# Altium PCB DSP6748_F.PcbDoc (part 14 of 16)
Units mil, origin at the board's own origin, x right, y up, seen from the top; angles counter-clockwise.
Board outline 8188.98 x 4055.12 mil, 4 copper layers (Top Layer, GND, VCC, Bottom Layer); 409 components, 262 nets, 1424 pads, 350 vias.
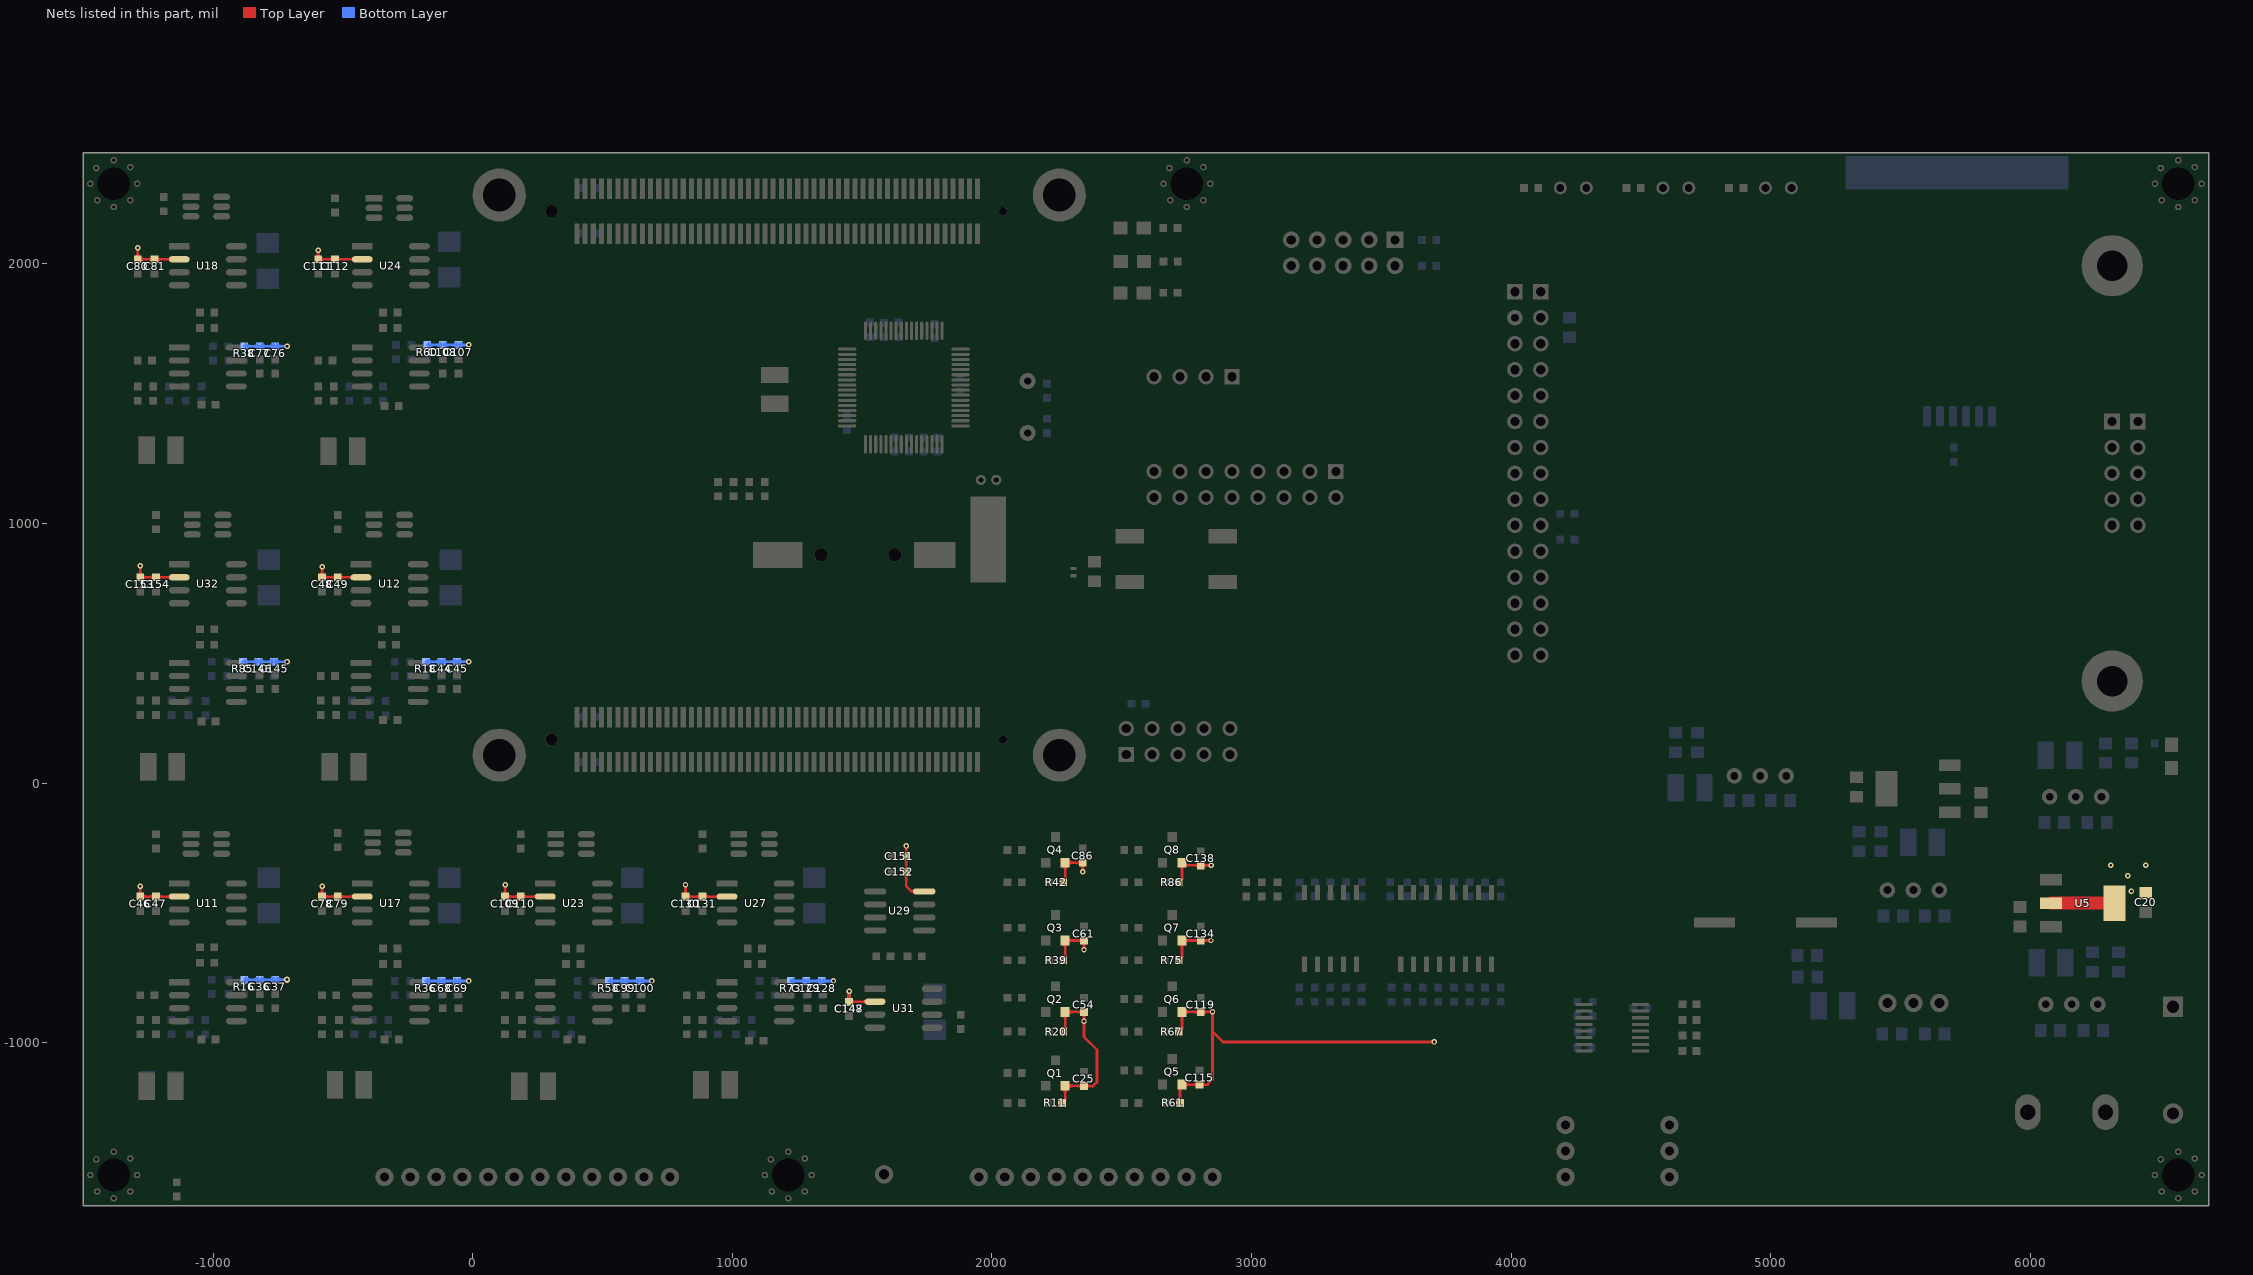
[diagram p16: the nets of this part, all layers, seen from the top]

## Via types
v1: diameter 21, hole 10, Top Layer to Bottom Layer, 244 vias
v2: diameter 20, hole 10, Top Layer to Bottom Layer, 84 vias
v3: diameter 32, hole 16, Top Layer to Bottom Layer, 11 vias
v4: diameter 24, hole 12, Top Layer to Bottom Layer, 7 vias
v5: diameter 39.37, hole 19.68, Top Layer to Bottom Layer, 3 vias
v6: diameter 30, hole 15, Top Layer to Bottom Layer, 1 vias

## Nets (pads, with @x,y where several pads share a name; then routed paths per layer and width w, separated by ;. In a path a pad name is that pad's centre, name@x,y a point inside that pad or via, vN(x,y) a via of type N, cw(c..) or ccw(c..) an arc to the next point about the centre after c; other vN are vias at no path point) (continued)
VCC+5V: C20.1 C25.2 C36.2 C37.2 C44.2 C45.2 C46.2 C47.2 C48.2 C49.2 C54.2 C61.2 C68.2 C69.2 C76.2 C77.2 C78.2 C79.2 C80.2 C81.2 C86.2 C99.2 C100.2 C107.2 C108.2 C109.2 C110.2 C111.2 C112.2 C115.2 C119.2 C128.2 C129.2 C130.2 C131.2 C134.2 C138.2 C145.2 C146.2 C147.2 C148.2 C151.2 C152.2 C153.2 C154.2 Q1.2 Q2.2 Q3.2 Q4.2 Q5.2 Q6.2 Q7.2 Q8.2 R11.2 R16.2 R18.2 R20.2 R36.2 R38.2 R39.2 R42.2 R58.2 R60.2 R61.2 R67.2 R73.2 R75.2 R85.2 R86.2 U5.2 U5.4 U11.2 U12.2 U17.2 U18.2 U23.2 U24.2 U27.2 U29.8 U31.2 U32.2 | length 21807.2
  Top Layer w10: v1(-1290.19,2062.52) C80.2@-1290.19,2017.52 C81.2@-1225.19,2017.52 U18.2@-1130.19,2017.52 ; v1(-1280.19,-397.48) C46.2@-1280.19,-437.48 C47.2@-1220.19,-437.48 U11.2@-1130.19,-437.48 ; v1(-1280.19,837.52) C153.2@-1280.19,792.52 C154.2@-1220.19,792.52 U32.2@-1130.19,792.52 ; v1@-599.08,2048.63 cw(c-608.47,2039.24) -595.19,2039.24 cw(c-581.91,2039.24) v1@-591.3,2048.63 ; v1(-595.19,2052.52) C111.2@-595.19,2017.52 C112.2@-530.19,2017.52 U24.2@-425.19,2017.52 ; v1(-580.19,-397.48) C78.2@-580.19,-437.48 C79.2@-520.19,-437.48 U17.2@-425.19,-437.48 ; v1(-580.19,832.52) C48.2@-580.19,792.52 C49.2@-520.19,792.52 U12.2@-430.19,792.52 ; v1(124.81,-392.48) C109.2@124.81,-437.48 C110.2@184.81,-437.48 U23.2@279.81,-437.48 ; v1(819.81,-392.48) C130.2@819.81,-437.48 C131.2@884.81,-437.48 U27.2@979.81,-437.48 ; v1(1449.81,-802.48) C147.2@1449.81,-842.48 U31.2@1549.81,-842.48 ; v1(1669.81,-242.48) C151.2@1669.81,-282.48 C152.2@1669.81,-342.48 1669.81,-397.48 1689.81,-417.48 U29.8@1739.3,-417.48 ; R11.2@2269.81,-1232.48 2282.21,-1220.08 Q1.2@2282.21,-1166.69 C25.2@2354.81,-1166.69 ; R20.2@2274.81,-957.48 2282.21,-950.08 Q2.2@2282.21,-881.69 C54.2@2354.02,-881.69 ; R39.2@2274.81,-682.48 2282.21,-675.08 Q3.2@2282.21,-606.69 C61.2@2354.81,-606.69 ; R42.2@2274.81,-382.48 2282.21,-375.08 Q4.2@2282.21,-306.69 C86.2@2349.81,-306.69 ; v1@2345.92,-338.59 ccw(c2336.53,-329.2) 2349.81,-329.2 ccw(c2363.09,-329.2) v1@2353.7,-338.59 ; v1(2349.81,-342.48) C86.2@2349.81,-307.48 ; v1@2350.92,-913.59 ccw(c2341.53,-904.2) 2354.81,-904.2 ccw(c2368.09,-904.2) v1@2358.7,-913.59 ; v1@2350.92,-638.59 ccw(c2341.53,-629.2) 2354.81,-629.2 ccw(c2368.09,-629.2) v1@2358.7,-638.59 ; C25.2@2354.81,-1167.48 2389.81,-1167.48 2404.81,-1152.48 2404.81,-1027.48 2354.81,-977.48 v1(2354.81,-917.48) C54.2@2354.81,-882.48 ; v1(2354.81,-642.48) C61.2@2354.81,-607.48 ; R67.2@2719.81,-957.48 2732.21,-945.08 Q6.2@2732.21,-886.69 ; R75.2@2719.81,-682.48 2732.21,-670.08 Q7.2@2732.21,-611.69 ; R86.2@2719.81,-382.48 2732.21,-370.08 2732.21,-316.69 C138.2@2804.02,-316.69 ; R61.2@2724.81,-1232.48 2724.81,-1169.09 Q5.2@2732.21,-1161.69 2830.6,-1161.69 2849.81,-1142.48 2849.81,-957.48 ; Q6.2@2732.21,-881.69 2844.81,-881.69 2849.81,-886.69 2849.81,-957.48 ; Q7.2@2732.21,-606.69 v1(2844.02,-606.69) ; C138.2@2804.81,-317.48 v1(2844.81,-317.48) ; v1(3704.81,-997.48) 2889.81,-997.48 2849.81,-957.48 ; C80.2@-1297.26,2024.59 ccw(c-1314.33,2041.66) -1290.19,2041.66 ; C80.2@-1297.26,2024.59 ccw(c-1314.33,2041.66) -1290.19,2041.66 ; C80.2@-1297.26,2024.59 ccw(c-1314.33,2041.66) -1290.19,2041.66 ; v1@-1294.08,2058.63 cw(c-1303.47,2049.24) -1290.19,2049.24 ; v1@-1294.08,2058.63 cw(c-1303.47,2049.24) -1290.19,2049.24 ; v1@-1294.08,2058.63 cw(c-1303.47,2049.24) -1290.19,2049.24 ; -1290.19,2041.66 ccw(c-1266.05,2041.66) C80.2@-1283.12,2024.59 ; -1290.19,2041.66 ccw(c-1266.05,2041.66) C80.2@-1283.12,2024.59 ; -1290.19,2041.66 ccw(c-1266.05,2041.66) C80.2@-1283.12,2024.59 ; -1290.19,2049.24 cw(c-1276.91,2049.24) v1@-1286.3,2058.63 ; -1290.19,2049.24 cw(c-1276.91,2049.24) v1@-1286.3,2058.63 ; -1290.19,2049.24 cw(c-1276.91,2049.24) v1@-1286.3,2058.63 ; C46.2@-1287.26,-430.41 ccw(c-1304.33,-413.34) -1280.19,-413.34 ; C46.2@-1287.26,-430.41 ccw(c-1304.33,-413.34) -1280.19,-413.34 ; C46.2@-1287.26,-430.41 ccw(c-1304.33,-413.34) -1280.19,-413.34 ; C153.2@-1287.26,799.59 ccw(c-1304.33,816.66) -1280.19,816.66 ; C153.2@-1287.26,799.59 ccw(c-1304.33,816.66) -1280.19,816.66 ; C153.2@-1287.26,799.59 ccw(c-1304.33,816.66) -1280.19,816.66 ; v1@-1284.08,-401.37 cw(c-1293.47,-410.76) -1280.19,-410.76 ; v1@-1284.08,-401.37 cw(c-1293.47,-410.76) -1280.19,-410.76 ; v1@-1284.08,-401.37 cw(c-1293.47,-410.76) -1280.19,-410.76 ; v1@-1284.08,833.63 cw(c-1293.47,824.24) -1280.19,824.24 ; v1@-1284.08,833.63 cw(c-1293.47,824.24) -1280.19,824.24 ; v1@-1284.08,833.63 cw(c-1293.47,824.24) -1280.19,824.24 ; C80.2@-1283.12,2010.45 cw(c-1266.05,1993.38) -1266.05,2017.52 ; C80.2@-1283.12,2010.45 cw(c-1266.05,1993.38) -1266.05,2017.52 ; C80.2@-1283.12,2010.45 cw(c-1266.05,1993.38) -1266.05,2017.52 ; C80.2@-1283.12,2024.59 ccw(c-1266.05,2041.66) -1266.05,2017.52 ; C80.2@-1283.12,2024.59 ccw(c-1266.05,2041.66) -1266.05,2017.52 ; C80.2@-1283.12,2024.59 ccw(c-1266.05,2041.66) -1266.05,2017.52 ; -1280.19,-413.34 ccw(c-1256.05,-413.34) C46.2@-1273.12,-430.41 ; -1280.19,-413.34 ccw(c-1256.05,-413.34) C46.2@-1273.12,-430.41 ; -1280.19,-413.34 ccw(c-1256.05,-413.34) C46.2@-1273.12,-430.41 ; -1280.19,-410.76 cw(c-1266.91,-410.76) v1@-1276.3,-401.37 ; -1280.19,-410.76 cw(c-1266.91,-410.76) v1@-1276.3,-401.37 ; -1280.19,-410.76 cw(c-1266.91,-410.76) v1@-1276.3,-401.37 ; -1280.19,816.66 ccw(c-1256.05,816.66) C153.2@-1273.12,799.59 ; -1280.19,816.66 ccw(c-1256.05,816.66) C153.2@-1273.12,799.59 ; -1280.19,816.66 ccw(c-1256.05,816.66) C153.2@-1273.12,799.59 ; -1280.19,824.24 cw(c-1266.91,824.24) v1@-1276.3,833.63 ; -1280.19,824.24 cw(c-1266.91,824.24) v1@-1276.3,833.63 ; -1280.19,824.24 cw(c-1266.91,824.24) v1@-1276.3,833.63 ; C46.2@-1273.12,-444.55 cw(c-1256.05,-461.62) -1256.05,-437.48 ; C46.2@-1273.12,-444.55 cw(c-1256.05,-461.62) -1256.05,-437.48 ; C46.2@-1273.12,-444.55 cw(c-1256.05,-461.62) -1256.05,-437.48 ; C46.2@-1273.12,-430.41 ccw(c-1256.05,-413.34) -1256.05,-437.48 ; C46.2@-1273.12,-430.41 ccw(c-1256.05,-413.34) -1256.05,-437.48 ; C46.2@-1273.12,-430.41 ccw(c-1256.05,-413.34) -1256.05,-437.48 ; C153.2@-1273.12,785.45 cw(c-1256.05,768.38) -1256.05,792.52 ; C153.2@-1273.12,785.45 cw(c-1256.05,768.38) -1256.05,792.52 ; C153.2@-1273.12,785.45 cw(c-1256.05,768.38) -1256.05,792.52 ; C153.2@-1273.12,799.59 ccw(c-1256.05,816.66) -1256.05,792.52 ; C153.2@-1273.12,799.59 ccw(c-1256.05,816.66) -1256.05,792.52 ; C153.2@-1273.12,799.59 ccw(c-1256.05,816.66) -1256.05,792.52 ; -1249.33,2017.52 cw(c-1249.33,1993.38) C81.2@-1232.26,2010.45 ; -1249.33,2017.52 ccw(c-1249.33,2041.66) C81.2@-1232.26,2024.59 ; -1249.33,2017.52 cw(c-1249.33,1993.38) C81.2@-1232.26,2010.45 ; -1249.33,2017.52 ccw(c-1249.33,2041.66) C81.2@-1232.26,2024.59 ; -1249.33,2017.52 ccw(c-1249.33,2041.66) C81.2@-1232.26,2024.59 ; -1249.33,2017.52 cw(c-1249.33,1993.38) C81.2@-1232.26,2010.45 ; -1244.33,-437.48 cw(c-1244.33,-461.62) C47.2@-1227.26,-444.55 ; -1244.33,-437.48 ccw(c-1244.33,-413.34) C47.2@-1227.26,-430.41 ; -1244.33,-437.48 cw(c-1244.33,-461.62) C47.2@-1227.26,-444.55 ; -1244.33,-437.48 ccw(c-1244.33,-413.34) C47.2@-1227.26,-430.41 ; -1244.33,-437.48 ccw(c-1244.33,-413.34) C47.2@-1227.26,-430.41 ; -1244.33,-437.48 cw(c-1244.33,-461.62) C47.2@-1227.26,-444.55 ; -1244.33,792.52 cw(c-1244.33,768.38) C154.2@-1227.26,785.45 ; -1244.33,792.52 ccw(c-1244.33,816.66) C154.2@-1227.26,799.59 ; -1244.33,792.52 cw(c-1244.33,768.38) C154.2@-1227.26,785.45 ; -1244.33,792.52 ccw(c-1244.33,816.66) C154.2@-1227.26,799.59 ; -1244.33,792.52 ccw(c-1244.33,816.66) C154.2@-1227.26,799.59 ; -1244.33,792.52 cw(c-1244.33,768.38) C154.2@-1227.26,785.45 ; C81.2@-1218.12,2010.45 cw(c-1201.05,1993.38) -1201.05,2017.52 ; C81.2@-1218.12,2010.45 cw(c-1201.05,1993.38) -1201.05,2017.52 ; C81.2@-1218.12,2010.45 cw(c-1201.05,1993.38) -1201.05,2017.52 ; C81.2@-1218.12,2024.59 ccw(c-1201.05,2041.66) -1201.05,2017.52 ; C81.2@-1218.12,2024.59 ccw(c-1201.05,2041.66) -1201.05,2017.52 ; C81.2@-1218.12,2024.59 ccw(c-1201.05,2041.66) -1201.05,2017.52 ; C47.2@-1213.12,-444.55 cw(c-1196.05,-461.62) -1196.05,-437.48 ; C47.2@-1213.12,-444.55 cw(c-1196.05,-461.62) -1196.05,-437.48 ; C47.2@-1213.12,-444.55 cw(c-1196.05,-461.62) -1196.05,-437.48 ; C47.2@-1213.12,-430.41 ccw(c-1196.05,-413.34) -1196.05,-437.48 ; C47.2@-1213.12,-430.41 ccw(c-1196.05,-413.34) -1196.05,-437.48 ; C47.2@-1213.12,-430.41 ccw(c-1196.05,-413.34) -1196.05,-437.48 ; C154.2@-1213.12,785.45 cw(c-1196.05,768.38) -1196.05,792.52 ; C154.2@-1213.12,785.45 cw(c-1196.05,768.38) -1196.05,792.52 ; C154.2@-1213.12,785.45 cw(c-1196.05,768.38) -1196.05,792.52 ; C154.2@-1213.12,799.59 ccw(c-1196.05,816.66) -1196.05,792.52 ; C154.2@-1213.12,799.59 ccw(c-1196.05,816.66) -1196.05,792.52 ; C154.2@-1213.12,799.59 ccw(c-1196.05,816.66) -1196.05,792.52 ; -1175.09,-437.48 cw(c-1175.09,-454.38) U11.2@-1163.14,-442.43 ; -1175.09,-437.48 ccw(c-1175.09,-420.58) U11.2@-1163.14,-432.53 ; -1175.09,-437.48 cw(c-1175.09,-454.38) U11.2@-1163.14,-442.43 ; -1175.09,-437.48 ccw(c-1175.09,-420.58) U11.2@-1163.14,-432.53 ; -1175.09,-437.48 ccw(c-1175.09,-420.58) U11.2@-1163.14,-432.53 ; -1175.09,-437.48 cw(c-1175.09,-454.38) U11.2@-1163.14,-442.43 ; -1175.09,792.52 cw(c-1175.09,775.62) U32.2@-1163.14,787.57 ; -1175.09,792.52 ccw(c-1175.09,809.42) U32.2@-1163.14,797.47 ; -1175.09,792.52 cw(c-1175.09,775.62) U32.2@-1163.14,787.57 ; -1175.09,792.52 ccw(c-1175.09,809.42) U32.2@-1163.14,797.47 ; -1175.09,792.52 ccw(c-1175.09,809.42) U32.2@-1163.14,797.47 ; -1175.09,792.52 cw(c-1175.09,775.62) U32.2@-1163.14,787.57 ; -1175.09,2017.52 cw(c-1175.09,2000.62) U18.2@-1163.14,2012.57 ; -1175.09,2017.52 ccw(c-1175.09,2034.42) U18.2@-1163.14,2022.47 ; -1175.09,2017.52 cw(c-1175.09,2000.62) U18.2@-1163.14,2012.57 ; -1175.09,2017.52 ccw(c-1175.09,2034.42) U18.2@-1163.14,2022.47 ; -1175.09,2017.52 ccw(c-1175.09,2034.42) U18.2@-1163.14,2022.47 ; -1175.09,2017.52 cw(c-1175.09,2000.62) U18.2@-1163.14,2012.57 ; C111.2@-602.26,2024.59 ccw(c-619.33,2041.66) -595.19,2041.66 ; C111.2@-602.26,2024.59 ccw(c-619.33,2041.66) -595.19,2041.66 ; C111.2@-602.26,2024.59 ccw(c-619.33,2041.66) -595.19,2041.66 ; -595.19,2041.66 ccw(c-571.05,2041.66) C111.2@-588.12,2024.59 ; -595.19,2041.66 ccw(c-571.05,2041.66) C111.2@-588.12,2024.59 ; -595.19,2041.66 ccw(c-571.05,2041.66) C111.2@-588.12,2024.59 ; C111.2@-588.12,2010.45 cw(c-571.05,1993.38) -571.05,2017.52 ; C111.2@-588.12,2010.45 cw(c-571.05,1993.38) -571.05,2017.52 ; C111.2@-588.12,2010.45 cw(c-571.05,1993.38) -571.05,2017.52 ; C111.2@-588.12,2024.59 ccw(c-571.05,2041.66) -571.05,2017.52 ; C111.2@-588.12,2024.59 ccw(c-571.05,2041.66) -571.05,2017.52 ; C111.2@-588.12,2024.59 ccw(c-571.05,2041.66) -571.05,2017.52 ; C78.2@-587.26,-430.41 ccw(c-604.33,-413.34) -580.19,-413.34 ; C78.2@-587.26,-430.41 ccw(c-604.33,-413.34) -580.19,-413.34 ; C78.2@-587.26,-430.41 ccw(c-604.33,-413.34) -580.19,-413.34 ; C48.2@-587.26,799.59 ccw(c-604.33,816.66) -580.19,816.66 ; C48.2@-587.26,799.59 ccw(c-604.33,816.66) -580.19,816.66 ; C48.2@-587.26,799.59 ccw(c-604.33,816.66) -580.19,816.66 ; v1@-584.08,-401.37 cw(c-593.47,-410.76) -580.19,-410.76 ; v1@-584.08,-401.37 cw(c-593.47,-410.76) -580.19,-410.76 ; v1@-584.08,-401.37 cw(c-593.47,-410.76) -580.19,-410.76 ; v1@-584.08,828.63 cw(c-593.47,819.24) -580.19,819.24 ; v1@-584.08,828.63 cw(c-593.47,819.24) -580.19,819.24 ; v1@-584.08,828.63 cw(c-593.47,819.24) -580.19,819.24 ; -580.19,-413.34 ccw(c-556.05,-413.34) C78.2@-573.12,-430.41 ; -580.19,-413.34 ccw(c-556.05,-413.34) C78.2@-573.12,-430.41 ; -580.19,-413.34 ccw(c-556.05,-413.34) C78.2@-573.12,-430.41 ; -580.19,-410.76 cw(c-566.91,-410.76) v1@-576.3,-401.37 ; -580.19,-410.76 cw(c-566.91,-410.76) v1@-576.3,-401.37 ; -580.19,-410.76 cw(c-566.91,-410.76) v1@-576.3,-401.37 ; -580.19,816.66 ccw(c-556.05,816.66) C48.2@-573.12,799.59 ; -580.19,816.66 ccw(c-556.05,816.66) C48.2@-573.12,799.59 ; -580.19,816.66 ccw(c-556.05,816.66) C48.2@-573.12,799.59 ; -580.19,819.24 cw(c-566.91,819.24) v1@-576.3,828.63 ; -580.19,819.24 cw(c-566.91,819.24) v1@-576.3,828.63 ; -580.19,819.24 cw(c-566.91,819.24) v1@-576.3,828.63 ; C78.2@-573.12,-444.55 cw(c-556.05,-461.62) -556.05,-437.48 ; C78.2@-573.12,-444.55 cw(c-556.05,-461.62) -556.05,-437.48 ; C78.2@-573.12,-444.55 cw(c-556.05,-461.62) -556.05,-437.48 ; C78.2@-573.12,-430.41 ccw(c-556.05,-413.34) -556.05,-437.48 ; C78.2@-573.12,-430.41 ccw(c-556.05,-413.34) -556.05,-437.48 ; C78.2@-573.12,-430.41 ccw(c-556.05,-413.34) -556.05,-437.48 ; C48.2@-573.12,785.45 cw(c-556.05,768.38) -556.05,792.52 ; C48.2@-573.12,785.45 cw(c-556.05,768.38) -556.05,792.52 ; C48.2@-573.12,785.45 cw(c-556.05,768.38) -556.05,792.52 ; C48.2@-573.12,799.59 ccw(c-556.05,816.66) -556.05,792.52 ; C48.2@-573.12,799.59 ccw(c-556.05,816.66) -556.05,792.52 ; C48.2@-573.12,799.59 ccw(c-556.05,816.66) -556.05,792.52 ; -554.33,2017.52 cw(c-554.33,1993.38) C112.2@-537.26,2010.45 ; -554.33,2017.52 ccw(c-554.33,2041.66) C112.2@-537.26,2024.59 ; -554.33,2017.52 cw(c-554.33,1993.38) C112.2@-537.26,2010.45 ; -554.33,2017.52 ccw(c-554.33,2041.66) C112.2@-537.26,2024.59 ; -554.33,2017.52 ccw(c-554.33,2041.66) C112.2@-537.26,2024.59 ; -554.33,2017.52 cw(c-554.33,1993.38) C112.2@-537.26,2010.45 ; -544.33,-437.48 cw(c-544.33,-461.62) C79.2@-527.26,-444.55 ; -544.33,-437.48 ccw(c-544.33,-413.34) C79.2@-527.26,-430.41 ; -544.33,-437.48 cw(c-544.33,-461.62) C79.2@-527.26,-444.55 ; -544.33,-437.48 ccw(c-544.33,-413.34) C79.2@-527.26,-430.41 ; -544.33,-437.48 ccw(c-544.33,-413.34) C79.2@-527.26,-430.41 ; -544.33,-437.48 cw(c-544.33,-461.62) C79.2@-527.26,-444.55 ; -544.33,792.52 cw(c-544.33,768.38) C49.2@-527.26,785.45 ; -544.33,792.52 ccw(c-544.33,816.66) C49.2@-527.26,799.59 ; -544.33,792.52 cw(c-544.33,768.38) C49.2@-527.26,785.45 ; -544.33,792.52 ccw(c-544.33,816.66) C49.2@-527.26,799.59 ; -544.33,792.52 ccw(c-544.33,816.66) C49.2@-527.26,799.59 ; -544.33,792.52 cw(c-544.33,768.38) C49.2@-527.26,785.45 ; C112.2@-523.12,2010.45 cw(c-506.05,1993.38) -506.05,2017.52 ; C112.2@-523.12,2010.45 cw(c-506.05,1993.38) -506.05,2017.52 ; C112.2@-523.12,2010.45 cw(c-506.05,1993.38) -506.05,2017.52 ; C112.2@-523.12,2024.59 ccw(c-506.05,2041.66) -506.05,2017.52 ; C112.2@-523.12,2024.59 ccw(c-506.05,2041.66) -506.05,2017.52 ; C112.2@-523.12,2024.59 ccw(c-506.05,2041.66) -506.05,2017.52 ; C79.2@-513.12,-444.55 cw(c-496.05,-461.62) -496.05,-437.48 ; C79.2@-513.12,-444.55 cw(c-496.05,-461.62) -496.05,-437.48 ; C79.2@-513.12,-444.55 cw(c-496.05,-461.62) -496.05,-437.48 ; C79.2@-513.12,-430.41 ccw(c-496.05,-413.34) -496.05,-437.48 ; C79.2@-513.12,-430.41 ccw(c-496.05,-413.34) -496.05,-437.48 ; C79.2@-513.12,-430.41 ccw(c-496.05,-413.34) -496.05,-437.48 ; C49.2@-513.12,785.45 cw(c-496.05,768.38) -496.05,792.52 ; C49.2@-513.12,785.45 cw(c-496.05,768.38) -496.05,792.52 ; C49.2@-513.12,785.45 cw(c-496.05,768.38) -496.05,792.52 ; C49.2@-513.12,799.59 ccw(c-496.05,816.66) -496.05,792.52 ; C49.2@-513.12,799.59 ccw(c-496.05,816.66) -496.05,792.52 ; C49.2@-513.12,799.59 ccw(c-496.05,816.66) -496.05,792.52 ; -475.09,792.52 cw(c-475.09,775.62) U12.2@-463.14,787.57 ; -475.09,792.52 ccw(c-475.09,809.42) U12.2@-463.14,797.47 ; -475.09,792.52 cw(c-475.09,775.62) U12.2@-463.14,787.57 ; -475.09,792.52 ccw(c-475.09,809.42) U12.2@-463.14,797.47 ; -475.09,792.52 ccw(c-475.09,809.42) U12.2@-463.14,797.47 ; -475.09,792.52 cw(c-475.09,775.62) U12.2@-463.14,787.57 ; -470.09,-437.48 cw(c-470.09,-454.38) U17.2@-458.14,-442.43 ; -470.09,-437.48 ccw(c-470.09,-420.58) U17.2@-458.14,-432.53 ; -470.09,-437.48 cw(c-470.09,-454.38) U17.2@-458.14,-442.43 ; -470.09,-437.48 ccw(c-470.09,-420.58) U17.2@-458.14,-432.53 ; -470.09,-437.48 ccw(c-470.09,-420.58) U17.2@-458.14,-432.53 ; -470.09,-437.48 cw(c-470.09,-454.38) U17.2@-458.14,-442.43 ; -470.09,2017.52 cw(c-470.09,2000.62) U24.2@-458.14,2012.57 ; -470.09,2017.52 ccw(c-470.09,2034.42) U24.2@-458.14,2022.47 ; -470.09,2017.52 cw(c-470.09,2000.62) U24.2@-458.14,2012.57 ; -470.09,2017.52 ccw(c-470.09,2034.42) U24.2@-458.14,2022.47 ; -470.09,2017.52 ccw(c-470.09,2034.42) U24.2@-458.14,2022.47 ; -470.09,2017.52 cw(c-470.09,2000.62) U24.2@-458.14,2012.57 ; C109.2@117.74,-430.41 ccw(c100.67,-413.34) 124.81,-413.34 ; C109.2@117.74,-430.41 ccw(c100.67,-413.34) 124.81,-413.34 ; C109.2@117.74,-430.41 ccw(c100.67,-413.34) 124.81,-413.34 ; v1@120.92,-396.37 cw(c111.53,-405.76) 124.81,-405.76 ; v1@120.92,-396.37 cw(c111.53,-405.76) 124.81,-405.76 ; v1@120.92,-396.37 cw(c111.53,-405.76) 124.81,-405.76 ; 124.81,-413.34 ccw(c148.95,-413.34) C109.2@131.88,-430.41 ; 124.81,-413.34 ccw(c148.95,-413.34) C109.2@131.88,-430.41 ; 124.81,-413.34 ccw(c148.95,-413.34) C109.2@131.88,-430.41 ; 124.81,-405.76 cw(c138.09,-405.76) v1@128.7,-396.37 ; 124.81,-405.76 cw(c138.09,-405.76) v1@128.7,-396.37 ; 124.81,-405.76 cw(c138.09,-405.76) v1@128.7,-396.37 ; C109.2@131.88,-444.55 cw(c148.95,-461.62) 148.95,-437.48 ; C109.2@131.88,-444.55 cw(c148.95,-461.62) 148.95,-437.48 ; C109.2@131.88,-444.55 cw(c148.95,-461.62) 148.95,-437.48 ; C109.2@131.88,-430.41 ccw(c148.95,-413.34) 148.95,-437.48 ; C109.2@131.88,-430.41 ccw(c148.95,-413.34) 148.95,-437.48 ; C109.2@131.88,-430.41 ccw(c148.95,-413.34) 148.95,-437.48 ; 160.67,-437.48 cw(c160.67,-461.62) C110.2@177.74,-444.55 ; 160.67,-437.48 ccw(c160.67,-413.34) C110.2@177.74,-430.41 ; 160.67,-437.48 cw(c160.67,-461.62) C110.2@177.74,-444.55 ; 160.67,-437.48 ccw(c160.67,-413.34) C110.2@177.74,-430.41 ; 160.67,-437.48 ccw(c160.67,-413.34) C110.2@177.74,-430.41 ; 160.67,-437.48 cw(c160.67,-461.62) C110.2@177.74,-444.55 ; C110.2@191.88,-444.55 cw(c208.95,-461.62) 208.95,-437.48 ; C110.2@191.88,-444.55 cw(c208.95,-461.62) 208.95,-437.48 ; C110.2@191.88,-444.55 cw(c208.95,-461.62) 208.95,-437.48 ; C110.2@191.88,-430.41 ccw(c208.95,-413.34) 208.95,-437.48 ; C110.2@191.88,-430.41 ccw(c208.95,-413.34) 208.95,-437.48 ; C110.2@191.88,-430.41 ccw(c208.95,-413.34) 208.95,-437.48 ; 234.91,-437.48 cw(c234.91,-454.38) U23.2@246.86,-442.43 ; 234.91,-437.48 ccw(c234.91,-420.58) U23.2@246.86,-432.53 ; 234.91,-437.48 cw(c234.91,-454.38) U23.2@246.86,-442.43 ; 234.91,-437.48 ccw(c234.91,-420.58) U23.2@246.86,-432.53 ; 234.91,-437.48 ccw(c234.91,-420.58) U23.2@246.86,-432.53 ; 234.91,-437.48 cw(c234.91,-454.38) U23.2@246.86,-442.43 ; C130.2@812.74,-430.41 ccw(c795.67,-413.34) 819.81,-413.34 ; C130.2@812.74,-430.41 ccw(c795.67,-413.34) 819.81,-413.34 ; C130.2@812.74,-430.41 ccw(c795.67,-413.34) 819.81,-413.34 ; v1@815.92,-396.37 cw(c806.53,-405.76) 819.81,-405.76 ; v1@815.92,-396.37 cw(c806.53,-405.76) 819.81,-405.76 ; v1@815.92,-396.37 cw(c806.53,-405.76) 819.81,-405.76 ; 819.81,-413.34 ccw(c843.95,-413.34) C130.2@826.88,-430.41 ; 819.81,-413.34 ccw(c843.95,-413.34) C130.2@826.88,-430.41 ; 819.81,-413.34 ccw(c843.95,-413.34) C130.2@826.88,-430.41 ; 819.81,-405.76 cw(c833.09,-405.76) v1@823.7,-396.37 ; 819.81,-405.76 cw(c833.09,-405.76) v1@823.7,-396.37 ; 819.81,-405.76 cw(c833.09,-405.76) v1@823.7,-396.37 ; C130.2@826.88,-444.55 cw(c843.95,-461.62) 843.95,-437.48 ; C130.2@826.88,-444.55 cw(c843.95,-461.62) 843.95,-437.48 ; C130.2@826.88,-444.55 cw(c843.95,-461.62) 843.95,-437.48 ; C130.2@826.88,-430.41 ccw(c843.95,-413.34) 843.95,-437.48 ; C130.2@826.88,-430.41 ccw(c843.95,-413.34) 843.95,-437.48 ; C130.2@826.88,-430.41 ccw(c843.95,-413.34) 843.95,-437.48 ; 860.67,-437.48 cw(c860.67,-461.62) C131.2@877.74,-444.55 ; 860.67,-437.48 ccw(c860.67,-413.34) C131.2@877.74,-430.41 ; 860.67,-437.48 cw(c860.67,-461.62) C131.2@877.74,-444.55 ; 860.67,-437.48 ccw(c860.67,-413.34) C131.2@877.74,-430.41 ; 860.67,-437.48 ccw(c860.67,-413.34) C131.2@877.74,-430.41 ; 860.67,-437.48 cw(c860.67,-461.62) C131.2@877.74,-444.55 ; C131.2@891.88,-444.55 cw(c908.95,-461.62) 908.95,-437.48 ; C131.2@891.88,-444.55 cw(c908.95,-461.62) 908.95,-437.48 ; C131.2@891.88,-444.55 cw(c908.95,-461.62) 908.95,-437.48 ; C131.2@891.88,-430.41 ccw(c908.95,-413.34) 908.95,-437.48 ; C131.2@891.88,-430.41 ccw(c908.95,-413.34) 908.95,-437.48 ; C131.2@891.88,-430.41 ccw(c908.95,-413.34) 908.95,-437.48 ; 934.91,-437.48 cw(c934.91,-454.38) U27.2@946.86,-442.43 ; 934.91,-437.48 ccw(c934.91,-420.58) U27.2@946.86,-432.53 ; 934.91,-437.48 cw(c934.91,-454.38) U27.2@946.86,-442.43 ; 934.91,-437.48 ccw(c934.91,-420.58) U27.2@946.86,-432.53 ; 934.91,-437.48 ccw(c934.91,-420.58) U27.2@946.86,-432.53 ; 934.91,-437.48 cw(c934.91,-454.38) U27.2@946.86,-442.43 ; C147.2@1442.74,-835.41 ccw(c1425.67,-818.34) 1449.81,-818.34 ; C147.2@1442.74,-835.41 ccw(c1425.67,-818.34) 1449.81,-818.34 ; C147.2@1442.74,-835.41 ccw(c1425.67,-818.34) 1449.81,-818.34 ; v1@1445.92,-806.37 cw(c1436.53,-815.76) 1449.81,-815.76 ; v1@1445.92,-806.37 cw(c1436.53,-815.76) 1449.81,-815.76 ; v1@1445.92,-806.37 cw(c1436.53,-815.76) 1449.81,-815.76 ; 1449.81,-818.34 ccw(c1473.95,-818.34) C147.2@1456.88,-835.41 ; 1449.81,-818.34 ccw(c1473.95,-818.34) C147.2@1456.88,-835.41 ; 1449.81,-818.34 ccw(c1473.95,-818.34) C147.2@1456.88,-835.41 ; 1449.81,-815.76 cw(c1463.09,-815.76) v1@1453.7,-806.37 ; 1449.81,-815.76 cw(c1463.09,-815.76) v1@1453.7,-806.37 ; 1449.81,-815.76 cw(c1463.09,-815.76) v1@1453.7,-806.37 ; C147.2@1456.88,-849.55 cw(c1473.95,-866.62) 1473.95,-842.48 ; C147.2@1456.88,-849.55 cw(c1473.95,-866.62) 1473.95,-842.48 ; C147.2@1456.88,-849.55 cw(c1473.95,-866.62) 1473.95,-842.48 ; C147.2@1456.88,-835.41 ccw(c1473.95,-818.34) 1473.95,-842.48 ; C147.2@1456.88,-835.41 ccw(c1473.95,-818.34) 1473.95,-842.48 ; C147.2@1456.88,-835.41 ccw(c1473.95,-818.34) 1473.95,-842.48 ; 1504.91,-842.48 cw(c1504.91,-859.38) U31.2@1516.86,-847.43 ; 1504.91,-842.48 ccw(c1504.91,-825.58) U31.2@1516.86,-837.53 ; 1504.91,-842.48 cw(c1504.91,-859.38) U31.2@1516.86,-847.43 ; 1504.91,-842.48 ccw(c1504.91,-825.58) U31.2@1516.86,-837.53 ; 1504.91,-842.48 ccw(c1504.91,-825.58) U31.2@1516.86,-837.53 ; 1504.91,-842.48 cw(c1504.91,-859.38) U31.2@1516.86,-847.43 ; C152.2@1662.74,-349.55 cw(c1645.67,-366.62) 1669.81,-366.62 ; C152.2@1662.74,-349.55 cw(c1645.67,-366.62) 1669.81,-366.62 ; C152.2@1662.74,-349.55 cw(c1645.67,-366.62) 1669.81,-366.62 ; C152.2@1662.74,-335.41 ccw(c1645.67,-318.34) 1669.81,-318.34 ; C152.2@1662.74,-335.41 ccw(c1645.67,-318.34) 1669.81,-318.34 ; C152.2@1662.74,-335.41 ccw(c1645.67,-318.34) 1669.81,-318.34 ; C151.2@1662.74,-289.55 cw(c1645.67,-306.62) 1669.81,-306.62 ; C151.2@1662.74,-289.55 cw(c1645.67,-306.62) 1669.81,-306.62 ; C151.2@1662.74,-289.55 cw(c1645.67,-306.62) 1669.81,-306.62 ; C151.2@1662.74,-275.41 ccw(c1645.67,-258.34) 1669.81,-258.34 ; C151.2@1662.74,-275.41 ccw(c1645.67,-258.34) 1669.81,-258.34 ; C151.2@1662.74,-275.41 ccw(c1645.67,-258.34) 1669.81,-258.34 ; v1@1665.92,-246.37 cw(c1656.53,-255.76) 1669.81,-255.76 ; v1@1665.92,-246.37 cw(c1656.53,-255.76) 1669.81,-255.76 ; v1@1665.92,-246.37 cw(c1656.53,-255.76) 1669.81,-255.76 ; 1669.81,-366.62 cw(c1693.95,-366.62) C152.2@1676.88,-349.55 ; 1669.81,-366.62 cw(c1693.95,-366.62) C152.2@1676.88,-349.55 ; 1669.81,-366.62 cw(c1693.95,-366.62) C152.2@1676.88,-349.55 ; 1669.81,-318.34 ccw(c1693.95,-318.34) C152.2@1676.88,-335.41 ; 1669.81,-318.34 ccw(c1693.95,-318.34) C152.2@1676.88,-335.41 ; 1669.81,-318.34 ccw(c1693.95,-318.34) C152.2@1676.88,-335.41 ; 1669.81,-306.62 cw(c1693.95,-306.62) C151.2@1676.88,-289.55 ; 1669.81,-306.62 cw(c1693.95,-306.62) C151.2@1676.88,-289.55 ; 1669.81,-306.62 cw(c1693.95,-306.62) C151.2@1676.88,-289.55 ; 1669.81,-258.34 ccw(c1693.95,-258.34) C151.2@1676.88,-275.41 ; 1669.81,-258.34 ccw(c1693.95,-258.34) C151.2@1676.88,-275.41 ; 1669.81,-258.34 ccw(c1693.95,-258.34) C151.2@1676.88,-275.41 ; 1669.81,-255.76 cw(c1683.09,-255.76) v1@1673.7,-246.37 ; 1669.81,-255.76 cw(c1683.09,-255.76) v1@1673.7,-246.37 ; 1669.81,-255.76 cw(c1683.09,-255.76) v1@1673.7,-246.37 ; 1691.36,-417.48 cw(c1691.36,-433.92) U29.8@1702.99,-422.3 ; 1691.36,-417.48 ccw(c1691.36,-401.04) U29.8@1702.99,-412.66 ; 1691.36,-417.48 cw(c1691.36,-433.92) U29.8@1702.99,-422.3 ; 1691.36,-417.48 ccw(c1691.36,-401.04) U29.8@1702.99,-412.66 ; 1691.36,-417.48 ccw(c1691.36,-401.04) U29.8@1702.99,-412.66 ; 1691.36,-417.48 cw(c1691.36,-433.92) U29.8@1702.99,-422.3 ; Q1.2@2273.22,-1176.67 cw(c2251.51,-1198.38) 2282.21,-1198.38 ; Q1.2@2273.22,-1176.67 cw(c2251.51,-1198.38) 2282.21,-1198.38 ; Q1.2@2273.22,-1176.67 cw(c2251.51,-1198.38) 2282.21,-1198.38 ; Q2.2@2273.22,-891.67 cw(c2251.51,-913.38) 2282.21,-913.38 ; Q2.2@2273.22,-891.67 cw(c2251.51,-913.38) 2282.21,-913.38 ; Q2.2@2273.22,-891.67 cw(c2251.51,-913.38) 2282.21,-913.38 ; Q3.2@2273.22,-616.67 cw(c2251.51,-638.38) 2282.21,-638.38 ; Q3.2@2273.22,-616.67 cw(c2251.51,-638.38) 2282.21,-638.38 ; Q3.2@2273.22,-616.67 cw(c2251.51,-638.38) 2282.21,-638.38 ; Q4.2@2273.22,-316.67 cw(c2251.51,-338.38) 2282.21,-338.38 ; Q4.2@2273.22,-316.67 cw(c2251.51,-338.38) 2282.21,-338.38 ; Q4.2@2273.22,-316.67 cw(c2251.51,-338.38) 2282.21,-338.38 ; 2282.21,-1198.38 cw(c2312.91,-1198.38) Q1.2@2291.2,-1176.67 ; 2282.21,-1198.38 cw(c2312.91,-1198.38) Q1.2@2291.2,-1176.67 ; 2282.21,-1198.38 cw(c2312.91,-1198.38) Q1.2@2291.2,-1176.67 ; 2282.21,-913.38 cw(c2312.91,-913.38) Q2.2@2291.2,-891.67 ; 2282.21,-913.38 cw(c2312.91,-913.38) Q2.2@2291.2,-891.67 ; 2282.21,-913.38 cw(c2312.91,-913.38) Q2.2@2291.2,-891.67 ; 2282.21,-638.38 cw(c2312.91,-638.38) Q3.2@2291.2,-616.67 ; 2282.21,-638.38 cw(c2312.91,-638.38) Q3.2@2291.2,-616.67 ; 2282.21,-638.38 cw(c2312.91,-638.38) Q3.2@2291.2,-616.67 ; 2282.21,-338.38 cw(c2312.91,-338.38) Q4.2@2291.2,-316.67 ; 2282.21,-338.38 cw(c2312.91,-338.38) Q4.2@2291.2,-316.67 ; 2282.21,-338.38 cw(c2312.91,-338.38) Q4.2@2291.2,-316.67 ; Q1.2@2291.2,-1175.68 cw(c2312.91,-1197.39) 2312.91,-1166.69 ; Q1.2@2291.2,-1175.68 cw(c2312.91,-1197.39) 2312.91,-1166.69 ; Q1.2@2291.2,-1175.68 cw(c2312.91,-1197.39) 2312.91,-1166.69 ; Q1.2@2291.2,-1157.7 ccw(c2312.91,-1135.99) 2312.91,-1166.69 ; Q1.2@2291.2,-1157.7 ccw(c2312.91,-1135.99) 2312.91,-1166.69 ; Q1.2@2291.2,-1157.7 ccw(c2312.91,-1135.99) 2312.91,-1166.69 ; Q2.2@2291.2,-890.68 cw(c2312.91,-912.39) 2312.91,-881.69 ; Q2.2@2291.2,-890.68 cw(c2312.91,-912.39) 2312.91,-881.69 ; Q2.2@2291.2,-890.68 cw(c2312.91,-912.39) 2312.91,-881.69 ; Q2.2@2291.2,-872.7 ccw(c2312.91,-850.99) 2312.91,-881.69 ; Q2.2@2291.2,-872.7 ccw(c2312.91,-850.99) 2312.91,-881.69 ; Q2.2@2291.2,-872.7 ccw(c2312.91,-850.99) 2312.91,-881.69 ; Q3.2@2291.2,-615.68 cw(c2312.91,-637.39) 2312.91,-606.69 ; Q3.2@2291.2,-615.68 cw(c2312.91,-637.39) 2312.91,-606.69 ; Q3.2@2291.2,-615.68 cw(c2312.91,-637.39) 2312.91,-606.69 ; Q3.2@2291.2,-597.7 ccw(c2312.91,-575.99) 2312.91,-606.69 ; Q3.2@2291.2,-597.7 ccw(c2312.91,-575.99) 2312.91,-606.69 ; Q3.2@2291.2,-597.7 ccw(c2312.91,-575.99) 2312.91,-606.69 ; Q4.2@2291.2,-315.68 cw(c2312.91,-337.39) 2312.91,-306.69 ; Q4.2@2291.2,-315.68 cw(c2312.91,-337.39) 2312.91,-306.69 ; Q4.2@2291.2,-315.68 cw(c2312.91,-337.39) 2312.91,-306.69 ; Q4.2@2291.2,-297.7 ccw(c2312.91,-275.99) 2312.91,-306.69 ; Q4.2@2291.2,-297.7 ccw(c2312.91,-275.99) 2312.91,-306.69 ; Q4.2@2291.2,-297.7 ccw(c2312.91,-275.99) 2312.91,-306.69 ; 2323.77,-306.69 cw(c2323.77,-333.52) C86.2@2342.74,-314.55 ; 2323.77,-306.69 cw(c2323.77,-333.52) C86.2@2342.74,-314.55 ; 2323.77,-306.69 cw(c2323.77,-333.52) C86.2@2342.74,-314.55 ; 2327.57,-306.69 ccw(c2327.57,-285.24) C86.2@2342.74,-300.41 ; 2327.57,-306.69 ccw(c2327.57,-285.24) C86.2@2342.74,-300.41 ; 2327.57,-306.69 ccw(c2327.57,-285.24) C86.2@2342.74,-300.41 ; 2328.77,-1166.69 cw(c2328.77,-1193.52) C25.2@2347.74,-1174.55 ; 2328.77,-1166.69 cw(c2328.77,-1193.52) C25.2@2347.74,-1174.55 ; 2328.77,-1166.69 cw(c2328.77,-1193.52) C25.2@2347.74,-1174.55 ; 2328.77,-881.69 cw(c2328.77,-908.52) C54.2@2347.74,-889.55 ; 2328.77,-881.69 cw(c2328.77,-908.52) C54.2@2347.74,-889.55 ; 2328.77,-881.69 cw(c2328.77,-908.52) C54.2@2347.74,-889.55 ; 2328.77,-606.69 cw(c2328.77,-633.52) C61.2@2347.74,-614.55 ; 2328.77,-606.69 cw(c2328.77,-633.52) C61.2@2347.74,-614.55 ; 2328.77,-606.69 cw(c2328.77,-633.52) C61.2@2347.74,-614.55 ; 2332.57,-1166.69 ccw(c2332.57,-1145.24) C25.2@2347.74,-1160.41 ; 2332.57,-1166.69 ccw(c2332.57,-1145.24) C25.2@2347.74,-1160.41 ; 2332.57,-1166.69 ccw(c2332.57,-1145.24) C25.2@2347.74,-1160.41 ; 2332.57,-881.69 ccw(c2332.57,-860.24) C54.2@2347.74,-875.41 ; 2332.57,-881.69 ccw(c2332.57,-860.24) C54.2@2347.74,-875.41 ; 2332.57,-881.69 ccw(c2332.57,-860.24) C54.2@2347.74,-875.41 ; 2332.57,-606.69 ccw(c2332.57,-585.24) C61.2@2347.74,-600.41 ; 2332.57,-606.69 ccw(c2332.57,-585.24) C61.2@2347.74,-600.41 ; 2332.57,-606.69 ccw(c2332.57,-585.24) C61.2@2347.74,-600.41 ; C86.2@2342.74,-314.55 cw(c2325.67,-331.62) 2349.81,-331.62 ; C86.2@2342.74,-314.55 cw(c2325.67,-331.62) 2349.81,-331.62 ; C86.2@2342.74,-314.55 cw(c2325.67,-331.62) 2349.81,-331.62 ; C54.2@2347.74,-889.55 cw(c2330.67,-906.62) 2354.81,-906.62 ; C54.2@2347.74,-889.55 cw(c2330.67,-906.62) 2354.81,-906.62 ; C54.2@2347.74,-889.55 cw(c2330.67,-906.62) 2354.81,-906.62 ; C61.2@2347.74,-614.55 cw(c2330.67,-631.62) 2354.81,-631.62 ; C61.2@2347.74,-614.55 cw(c2330.67,-631.62) 2354.81,-631.62 ; C61.2@2347.74,-614.55 cw(c2330.67,-631.62) 2354.81,-631.62 ; 2349.81,-331.62 cw(c2373.95,-331.62) C86.2@2356.88,-314.55 ; 2349.81,-331.62 cw(c2373.95,-331.62) C86.2@2356.88,-314.55 ; 2349.81,-331.62 cw(c2373.95,-331.62) C86.2@2356.88,-314.55 ; v1@2350.92,-921.37 cw(c2341.53,-930.76) 2354.81,-930.76 ; v1@2350.92,-921.37 cw(c2341.53,-930.76) 2354.81,-930.76 ; v1@2350.92,-921.37 cw(c2341.53,-930.76) 2354.81,-930.76 ; 2354.81,-930.76 cw(c2368.09,-930.76) v1@2358.7,-921.37 ; 2354.81,-930.76 cw(c2368.09,-930.76) v1@2358.7,-921.37 ; 2354.81,-930.76 cw(c2368.09,-930.76) v1@2358.7,-921.37 ; 2354.81,-906.62 cw(c2378.95,-906.62) C54.2@2361.88,-889.55 ; 2354.81,-906.62 cw(c2378.95,-906.62) C54.2@2361.88,-889.55 ; 2354.81,-906.62 cw(c2378.95,-906.62) C54.2@2361.88,-889.55 ; 2354.81,-631.62 cw(c2378.95,-631.62) C61.2@2361.88,-614.55 ; 2354.81,-631.62 cw(c2378.95,-631.62) C61.2@2361.88,-614.55 ; 2354.81,-631.62 cw(c2378.95,-631.62) C61.2@2361.88,-614.55 ; C25.2@2361.88,-1174.55 cw(c2378.95,-1191.62) 2378.95,-1167.48 ; C25.2@2361.88,-1174.55 cw(c2378.95,-1191.62) 2378.95,-1167.48 ; C25.2@2361.88,-1174.55 cw(c2378.95,-1191.62) 2378.95,-1167.48 ; C25.2@2361.88,-1160.41 ccw(c2378.95,-1143.34) 2378.95,-1167.48 ; C25.2@2361.88,-1160.41 ccw(c2378.95,-1143.34) 2378.95,-1167.48 ; C25.2@2361.88,-1160.41 ccw(c2378.95,-1143.34) 2378.95,-1167.48 ; R61.2@2717.74,-1225.41 ccw(c2700.67,-1208.34) 2724.81,-1208.34 ; R61.2@2717.74,-1225.41 ccw(c2700.67,-1208.34) 2724.81,-1208.34 ; R61.2@2717.74,-1225.41 ccw(c2700.67,-1208.34) 2724.81,-1208.34 ; Q6.2@2723.22,-891.67 cw(c2701.51,-913.38) 2732.21,-913.38 ; Q6.2@2723.22,-891.67 cw(c2701.51,-913.38) 2732.21,-913.38 ; Q6.2@2723.22,-891.67 cw(c2701.51,-913.38) 2732.21,-913.38 ; Q7.2@2723.22,-616.67 cw(c2701.51,-638.38) 2732.21,-638.38 ; Q7.2@2723.22,-616.67 cw(c2701.51,-638.38) 2732.21,-638.38 ; Q7.2@2723.22,-616.67 cw(c2701.51,-638.38) 2732.21,-638.38 ; Q8.2@2723.22,-316.67 cw(c2701.51,-338.38) 2732.21,-338.38 ; Q8.2@2723.22,-316.67 cw(c2701.51,-338.38) 2732.21,-338.38 ; Q8.2@2723.22,-316.67 cw(c2701.51,-338.38) 2732.21,-338.38 ; 2724.81,-1208.34 ccw(c2748.95,-1208.34) R61.2@2731.88,-1225.41 ; 2724.81,-1208.34 ccw(c2748.95,-1208.34) R61.2@2731.88,-1225.41 ; 2724.81,-1208.34 ccw(c2748.95,-1208.34) R61.2@2731.88,-1225.41 ; 2732.21,-913.38 cw(c2762.91,-913.38) Q6.2@2741.2,-891.67 ; 2732.21,-913.38 cw(c2762.91,-913.38) Q6.2@2741.2,-891.67 ; 2732.21,-913.38 cw(c2762.91,-913.38) Q6.2@2741.2,-891.67 ; 2732.21,-638.38 cw(c2762.91,-638.38) Q7.2@2741.2,-616.67 ; 2732.21,-638.38 cw(c2762.91,-638.38) Q7.2@2741.2,-616.67 ; 2732.21,-638.38 cw(c2762.91,-638.38) Q7.2@2741.2,-616.67 ; 2732.21,-338.38 cw(c2762.91,-338.38) Q8.2@2741.2,-316.67 ; 2732.21,-338.38 cw(c2762.91,-338.38) Q8.2@2741.2,-316.67 ; 2732.21,-338.38 cw(c2762.91,-338.38) Q8.2@2741.2,-316.67 ; Q5.2@2741.2,-1170.68 cw(c2762.91,-1192.39) 2762.91,-1161.69 ; Q5.2@2741.2,-1170.68 cw(c2762.91,-1192.39) 2762.91,-1161.69 ; Q5.2@2741.2,-1170.68 cw(c2762.91,-1192.39) 2762.91,-1161.69 ; Q5.2@2741.2,-1152.7 ccw(c2762.91,-1130.99) 2762.91,-1161.69 ; Q5.2@2741.2,-1152.7 ccw(c2762.91,-1130.99) 2762.91,-1161.69 ; Q5.2@2741.2,-1152.7 ccw(c2762.91,-1130.99) 2762.91,-1161.69 ; Q6.2@2741.2,-890.68 cw(c2762.91,-912.39) 2762.91,-881.69 ; Q6.2@2741.2,-890.68 cw(c2762.91,-912.39) 2762.91,-881.69 ; Q6.2@2741.2,-890.68 cw(c2762.91,-912.39) 2762.91,-881.69 ; Q6.2@2741.2,-872.7 ccw(c2762.91,-850.99) 2762.91,-881.69 ; Q6.2@2741.2,-872.7 ccw(c2762.91,-850.99) 2762.91,-881.69 ; Q6.2@2741.2,-872.7 ccw(c2762.91,-850.99) 2762.91,-881.69 ; Q7.2@2741.2,-615.68 cw(c2762.91,-637.39) 2762.91,-606.69 ; Q7.2@2741.2,-615.68 cw(c2762.91,-637.39) 2762.91,-606.69 ; Q7.2@2741.2,-615.68 cw(c2762.91,-637.39) 2762.91,-606.69 ; Q7.2@2741.2,-597.7 ccw(c2762.91,-575.99) 2762.91,-606.69 ; Q7.2@2741.2,-597.7 ccw(c2762.91,-575.99) 2762.91,-606.69 ; Q7.2@2741.2,-597.7 ccw(c2762.91,-575.99) 2762.91,-606.69 ; 2773.77,-1161.69 cw(c2773.77,-1188.52) C115.2@2792.74,-1169.55 ; 2773.77,-1161.69 cw(c2773.77,-1188.52) C115.2@2792.74,-1169.55 ; 2773.77,-1161.69 cw(c2773.77,-1188.52) C115.2@2792.74,-1169.55 ; 2777.57,-1161.69 ccw(c2777.57,-1140.24) C115.2@2792.74,-1155.41 ; 2777.57,-1161.69 ccw(c2777.57,-1140.24) C115.2@2792.74,-1155.41 ; 2777.57,-1161.69 ccw(c2777.57,-1140.24) C115.2@2792.74,-1155.41 ; 2778.77,-881.69 cw(c2778.77,-908.52) C119.2@2797.74,-889.55 ; 2778.77,-881.69 cw(c2778.77,-908.52) C119.2@2797.74,-889.55 ; 2778.77,-881.69 cw(c2778.77,-908.52) C119.2@2797.74,-889.55 ; 2778.77,-606.69 cw(c2778.77,-633.52) C134.2@2797.74,-614.55 ; 2778.77,-606.69 cw(c2778.77,-633.52) C134.2@2797.74,-614.55 ; 2778.77,-606.69 cw(c2778.77,-633.52) C134.2@2797.74,-614.55 ; 2778.77,-316.69 cw(c2778.77,-343.52) C138.2@2797.74,-324.55 ; 2778.77,-316.69 cw(c2778.77,-343.52) C138.2@2797.74,-324.55 ; 2778.77,-316.69 cw(c2778.77,-343.52) C138.2@2797.74,-324.55 ; 2782.57,-881.69 ccw(c2782.57,-860.24) C119.2@2797.74,-875.41 ; 2782.57,-881.69 ccw(c2782.57,-860.24) C119.2@2797.74,-875.41 ; 2782.57,-881.69 ccw(c2782.57,-860.24) C119.2@2797.74,-875.41 ; 2782.57,-606.69 ccw(c2782.57,-585.24) C134.2@2797.74,-600.41 ; 2782.57,-606.69 ccw(c2782.57,-585.24) C134.2@2797.74,-600.41 ; 2782.57,-606.69 ccw(c2782.57,-585.24) C134.2@2797.74,-600.41 ; 2782.57,-316.69 ccw(c2782.57,-295.24) C138.2@2797.74,-310.41 ; 2782.57,-316.69 ccw(c2782.57,-295.24) C138.2@2797.74,-310.41 ; 2782.57,-316.69 ccw(c2782.57,-295.24) C138.2@2797.74,-310.41 ; C115.2@2806.88,-1169.55 cw(c2825.85,-1188.52) 2825.85,-1161.69 ; C115.2@2806.88,-1169.55 cw(c2825.85,-1188.52) 2825.85,-1161.69 ; C115.2@2806.88,-1169.55 cw(c2825.85,-1188.52) 2825.85,-1161.69 ; C115.2@2806.88,-1155.41 ccw(c2822.05,-1140.24) 2822.05,-1161.69 ; C115.2@2806.88,-1155.41 ccw(c2822.05,-1140.24) 2822.05,-1161.69 ; C115.2@2806.88,-1155.41 ccw(c2822.05,-1140.24) 2822.05,-1161.69 ; C119.2@2811.88,-889.55 cw(c2830.85,-908.52) 2830.85,-881.69 ; C119.2@2811.88,-889.55 cw(c2830.85,-908.52) 2830.85,-881.69 ; C119.2@2811.88,-889.55 cw(c2830.85,-908.52) 2830.85,-881.69 ; C119.2@2811.88,-875.41 ccw(c2827.05,-860.24) 2827.05,-881.69 ; C119.2@2811.88,-875.41 ccw(c2827.05,-860.24) 2827.05,-881.69 ; C119.2@2811.88,-875.41 ccw(c2827.05,-860.24) 2827.05,-881.69 ; C134.2@2811.88,-614.55 cw(c2830.85,-633.52) 2830.85,-606.69 ; C134.2@2811.88,-614.55 cw(c2830.85,-633.52) 2830.85,-606.69 ; C134.2@2811.88,-614.55 cw(c2830.85,-633.52) 2830.85,-606.69 ; C134.2@2811.88,-600.41 ccw(c2827.05,-585.24) 2827.05,-606.69 ; C134.2@2811.88,-600.41 ccw(c2827.05,-585.24) 2827.05,-606.69 ; C134.2@2811.88,-600.41 ccw(c2827.05,-585.24) 2827.05,-606.69 ; C138.2@2811.88,-324.55 cw(c2828.95,-341.62) 2828.95,-317.48 ; C138.2@2811.88,-324.55 cw(c2828.95,-341.62) 2828.95,-317.48 ; C138.2@2811.88,-324.55 cw(c2828.95,-341.62) 2828.95,-317.48 ; C138.2@2811.88,-310.41 ccw(c2828.95,-293.34) 2828.95,-317.48 ; C138.2@2811.88,-310.41 ccw(c2828.95,-293.34) 2828.95,-317.48 ; C138.2@2811.88,-310.41 ccw(c2828.95,-293.34) 2828.95,-317.48 ; 2830.74,-606.69 cw(c2830.74,-619.97) v1@2840.13,-610.58 ; 2830.74,-606.69 ccw(c2830.74,-593.41) v1@2840.13,-602.8 ; 2830.74,-606.69 cw(c2830.74,-619.97) v1@2840.13,-610.58 ; 2830.74,-606.69 ccw(c2830.74,-593.41) v1@2840.13,-602.8 ; 2830.74,-606.69 ccw(c2830.74,-593.41) v1@2840.13,-602.8 ; 2830.74,-606.69 cw(c2830.74,-619.97) v1@2840.13,-610.58 ; 2831.53,-317.48 cw(c2831.53,-330.76) v1@2840.92,-321.37 ; 2831.53,-317.48 ccw(c2831.53,-304.2) v1@2840.92,-313.59 ; 2831.53,-317.48 cw(c2831.53,-330.76) v1@2840.92,-321.37 ; 2831.53,-317.48 ccw(c2831.53,-304.2) v1@2840.92,-313.59 ; 2831.53,-317.48 ccw(c2831.53,-304.2) v1@2840.92,-313.59 ; 2831.53,-317.48 cw(c2831.53,-330.76) v1@2840.92,-321.37 ; 2836.53,-881.69 cw(c2836.53,-894.97) v1@2845.92,-885.58 ; 2836.53,-881.69 ccw(c2836.53,-868.41) v1@2845.92,-877.8 ; 2836.53,-881.69 cw(c2836.53,-894.97) v1@2845.92,-885.58 ; 2836.53,-881.69 ccw(c2836.53,-868.41) v1@2845.92,-877.8 ; 2836.53,-881.69 ccw(c2836.53,-868.41) v1@2845.92,-877.8 ; 2836.53,-881.69 cw(c2836.53,-894.97) v1@2845.92,-885.58 ; v1@2845.92,-885.58 cw(c2836.53,-894.97) 2849.81,-894.97 ; v1@2845.92,-885.58 cw(c2836.53,-894.97) 2849.81,-894.97 ; v1@2845.92,-885.58 cw(c2836.53,-894.97) 2849.81,-894.97 ; 2849.81,-894.97 cw(c2863.09,-894.97) v1@2853.7,-885.58 ; 2849.81,-894.97 cw(c2863.09,-894.97) v1@2853.7,-885.58 ; 2849.81,-894.97 cw(c2863.09,-894.97) v1@2853.7,-885.58 ; 3691.53,-997.48 cw(c3691.53,-1010.76) v1@3700.92,-1001.37 ; 3691.53,-997.48 ccw(c3691.53,-984.2) v1@3700.92,-993.59 ; 3691.53,-997.48 cw(c3691.53,-1010.76) v1@3700.92,-1001.37 ; 3691.53,-997.48 ccw(c3691.53,-984.2) v1@3700.92,-993.59 ; 3691.53,-997.48 ccw(c3691.53,-984.2) v1@3700.92,-993.59 ; 3691.53,-997.48 cw(c3691.53,-1010.76) v1@3700.92,-1001.37
  Top Layer w50: U5.2@6079.81,-463.03 U5.4@6323.9,-463.03